# EAGLE board 30_Pin_Breakout_v3 (EAGLE 9.7.0)
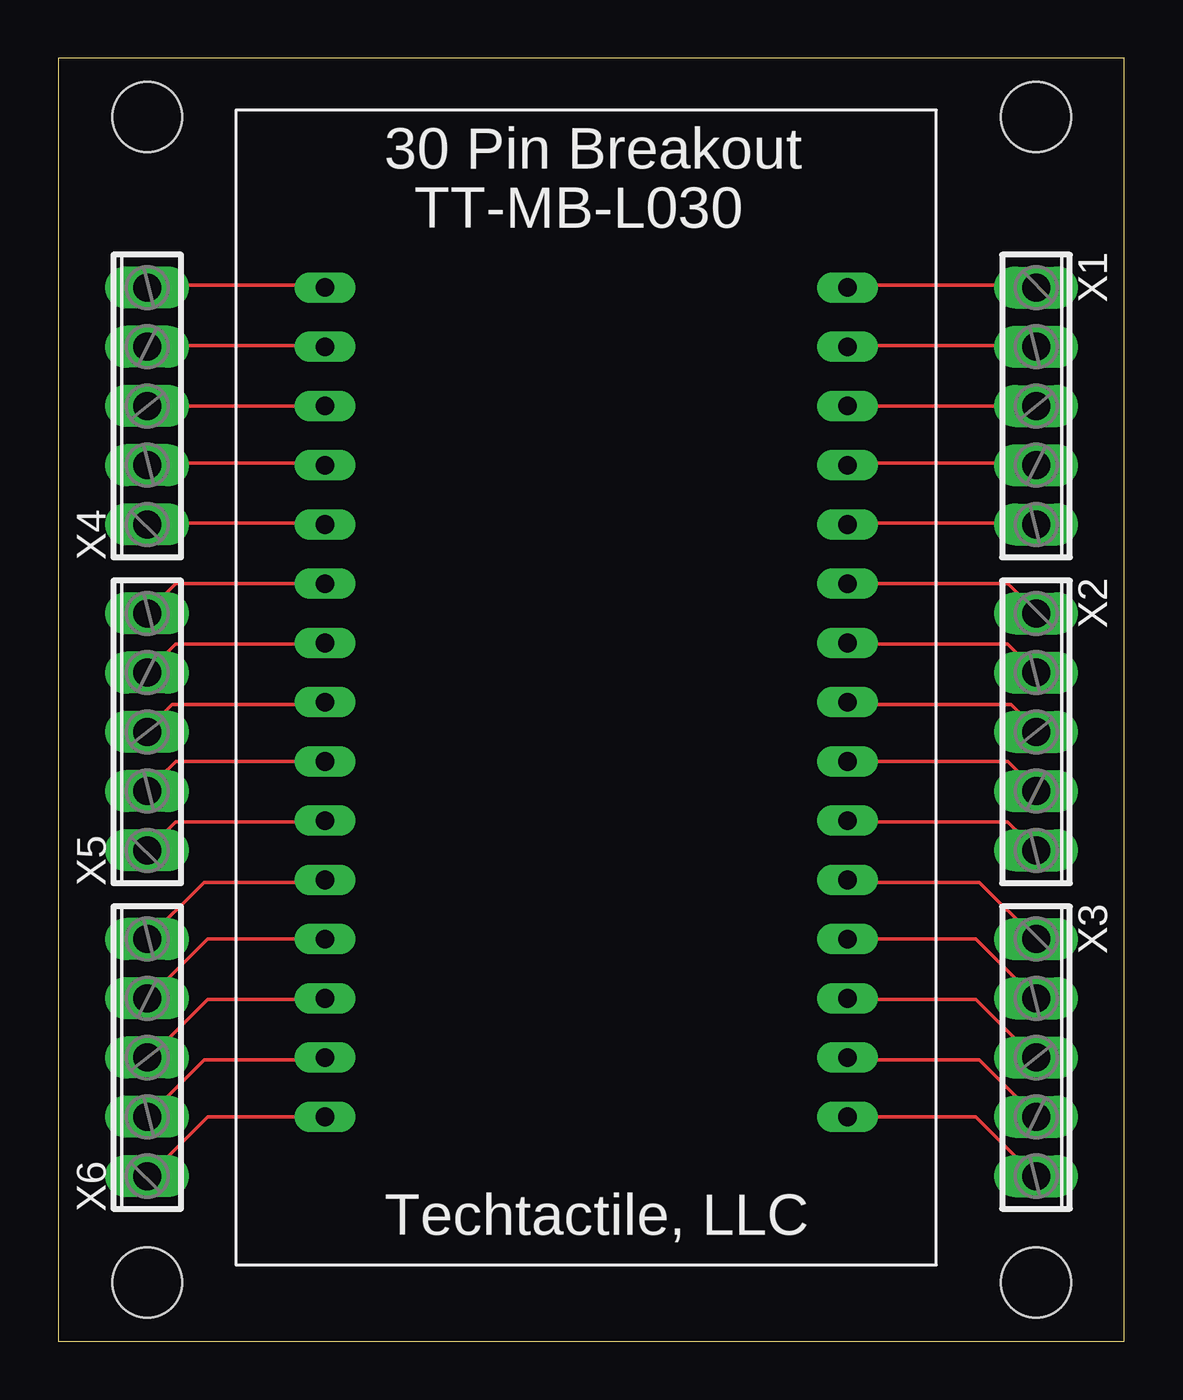
[diagram p0: board, top side]

Size 45.7 x 55.01 mm. Coordinates in mm from the lower left corner, seen from the top.
Outline: 0,0 45.7,0 45.7,55.01 0,55.01 0,0
Copper layers (1*16): Top 0.035mm / dielectric 1.5mm / Bottom 0.035mm
Design rules "default": minimum track width 6mil, minimum drill 0.35mm, track to track 6mil, track to pad 6mil, pad to pad 6mil, via to via 6mil, smd to smd 6mil, copper to edge 40mil, drill to drill 6mil, minimum pad ring 10mil, minimum via ring 8mil, stop-mask expansion 4mil, vias tented up to drill 0mil, thermal gap 10mil
Holes 3 mm at 3.81,2.52 41.91,2.52 41.91,52.49 3.81,52.49

## Footprints (pad centres in the part's own frame; a part is rotated, then mirrored left to right if it is on the bottom)
NODEMCUESP8266 = drill 0.8 long: 1 12.24,15.24; 2 12.24,12.7; 3 12.24,10.16; 4 12.24,7.62; 5 12.24,5.08; 6 12.24,2.54; 7 12.24,0; 8 12.24,-2.54; 9 12.24,-5.08; 10 12.24,-7.62; 11 12.24,-10.16; 12 12.24,-12.7; 13 12.24,-15.24; 14 12.24,-17.78; 15 12.24,-20.32; 16 -10.16,-20.32; 17 -10.16,-17.78; 18 -10.16,-15.24; 19 -10.16,-12.7; 20 -10.16,-10.16; 21 -10.16,-7.62; 22 -10.16,-5.08; 23 -10.16,-2.54; 24 -10.16,0; 25 -10.16,2.54; 26 -10.16,5.08; 27 -10.16,7.62; 28 -10.16,10.16; 29 -10.16,12.7; 30 -10.16,15.24
5POL254 = drill 1.2 long: 1 -5.08,0; 2 -2.54,0; 3 0,0; 4 2.54,0; 5 5.08,0

## Placement (x,y rotation side)
U$1  [NODEMCUESP8266]  21.59,29.94 0 top
X1  [5POL254]  41.91,40.1 270 top
X2  [5POL254]  41.91,26.13 270 top
X3  [5POL254]  41.91,12.16 270 top
X4  [5POL254]  3.81,40.1 90 top
X5  [5POL254]  3.81,26.13 90 top
X6  [5POL254]  3.81,12.16 90 top

## Library data of the parts
U$1 = NODEMCU
X1-X6 = con-phoenix-254; OC_FARNELL: unknown; OC_NEWARK: unknown

## Nets
P1: U$1.1 X1.1
P2: U$1.2 X1.2
P3: U$1.3 X1.3
P4: U$1.4 X1.4
P5: U$1.5 X1.5
P6: U$1.6 X2.1
P7: U$1.7 X2.2
P8: U$1.8 X2.3
P9: U$1.9 X2.4
P10: U$1.10 X2.5
P11: U$1.11 X3.1
P12: U$1.12 X3.2
P13: U$1.13 X3.3
P14: U$1.14 X3.4
P15: U$1.15 X3.5
P16: U$1.16 X6.1
P17: U$1.17 X6.2
P18: U$1.18 X6.3
P19: U$1.19 X6.4
P20: U$1.20 X6.5
P21: U$1.21 X5.1
P22: U$1.22 X5.2
P23: U$1.23 X5.3
P24: U$1.24 X5.4
P25: U$1.25 X5.5
P26: U$1.26 X4.1
P27: U$1.27 X4.2
P28: U$1.28 X4.3
P29: U$1.29 X4.4
P30: U$1.30 X4.5

## Tracks (layer width: path | path; a pad name or v marks a point on that pad's centre or on a via)
P1
  Top 0.152: U$1.1 33.83,45.28 41.91,45.28 X1.1
P2
  Top 0.152: U$1.2 33.83,42.69 41.91,42.69 X1.2
P3
  Top 0.152: X1.3 U$1.3
P4
  Top 0.152: U$1.4 33.83,37.66 41.91,37.66 X1.4
P5
  Top 0.152: U$1.5 33.83,35.07 41.91,35.07 X1.5
P6
  Top 0.152: U$1.6 40.69,32.48 41.91,31.26 X2.1
P7
  Top 0.152: X2.2 40.69,29.89 33.83,29.89 U$1.7
P8
  Top 0.152: U$1.8 33.83,27.3 40.84,27.3 41.91,26.23 X2.3
P9
  Top 0.152: U$1.9 40.69,24.86 41.91,23.64 X2.4
P10
  Top 0.152: X2.5 40.69,22.27 33.83,22.27 U$1.10
P11
  Top 0.152: X3.1 39.47,19.68 33.83,19.68 U$1.11
P12
  Top 0.152: U$1.12 39.32,17.24 41.91,14.65 X3.2
P13
  Top 0.152: U$1.13 33.83,14.65 39.32,14.65 41.91,12.06 X3.3
P14
  Top 0.152: X3.4 39.47,12.06 33.83,12.06 U$1.14
P15
  Top 0.152: U$1.15 39.32,9.62 41.91,7.03 X3.5
P16
  Top 0.152: U$1.16 6.4,9.62 3.81,7.03 X6.1
P17
  Top 0.152: X6.2 6.25,12.06 11.43,12.06 U$1.17
P18
  Top 0.152: U$1.18 11.43,14.65 6.4,14.65 3.81,12.06 X6.3
P19
  Top 0.152: U$1.19 6.4,17.24 3.81,14.65 X6.4
P20
  Top 0.152: X6.5 6.25,19.68 11.43,19.68 U$1.20
P21
  Top 0.152: X5.1 5.03,22.27 11.43,22.27 U$1.21
P22
  Top 0.152: U$1.22 5.03,24.86 3.81,23.64 X5.2
P23
  Top 0.152: U$1.23 11.43,27.3 4.88,27.3 3.81,26.23 X5.3
P24
  Top 0.152: X5.4 5.03,29.89 11.43,29.89 U$1.24
P25
  Top 0.152: U$1.25 5.03,32.48 3.81,31.26 X5.5
P26
  Top 0.152: U$1.26 11.43,35.07 3.81,35.07 X4.1
P27
  Top 0.152: U$1.27 11.43,37.66 3.81,37.66 X4.2
P28
  Top 0.152: X4.3 U$1.28
P29
  Top 0.152: U$1.29 11.43,42.69 3.81,42.69 X4.4
P30
  Top 0.152: U$1.30 11.43,45.28 3.81,45.28 X4.5

## Text on the board
tNames: 30 Pin Breakout | TT-MB-L030 | Techtactile, LLC
bNames: 30 Pin Breakout | TT-MB-L030 | zeobi.com | Techtactile, LLC.